# Altium PCB IR180-19_5GF.PcbDoc
Units mm, origin at the board's own origin, x right, y up, seen from the top; angles counter-clockwise.
Board outline 180 x 19.5 mm, 2 copper layers (Top Layer, Bottom Layer); 112 components, 106 nets, 224 pads, 49 vias.
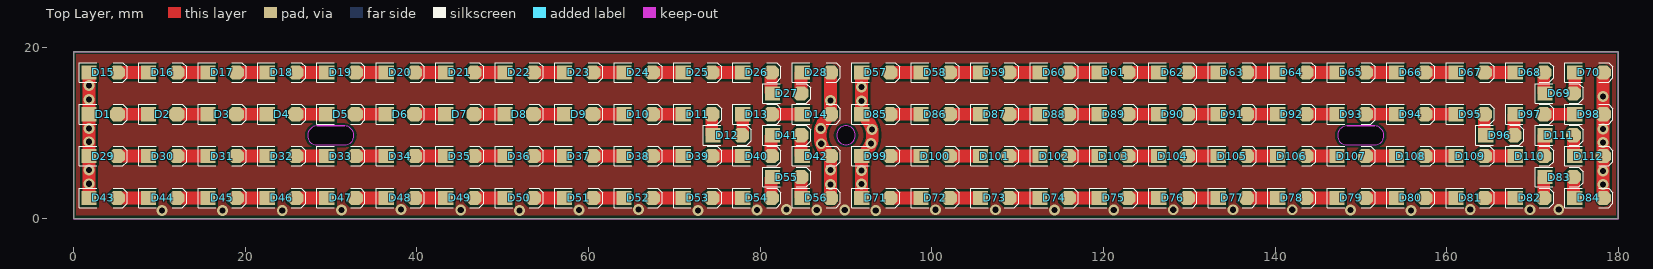
[diagram p0: Top Layer view]
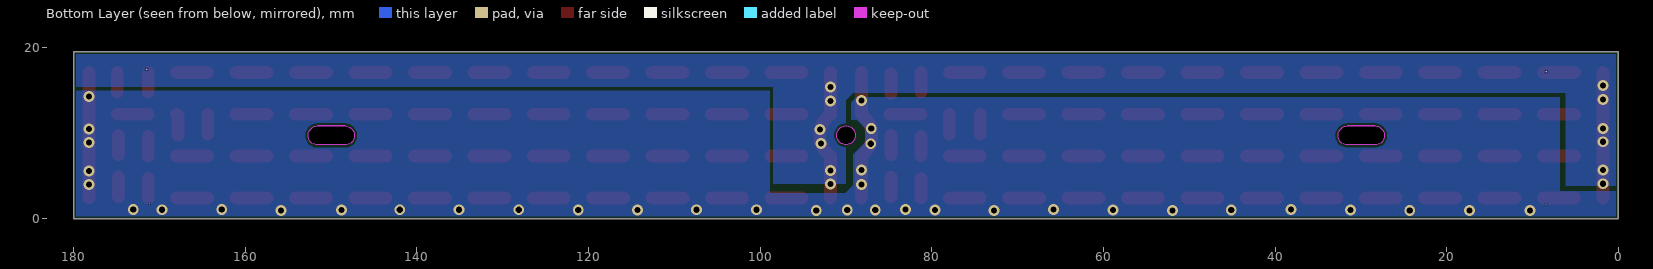
[diagram p1: Bottom Layer view, seen from below]
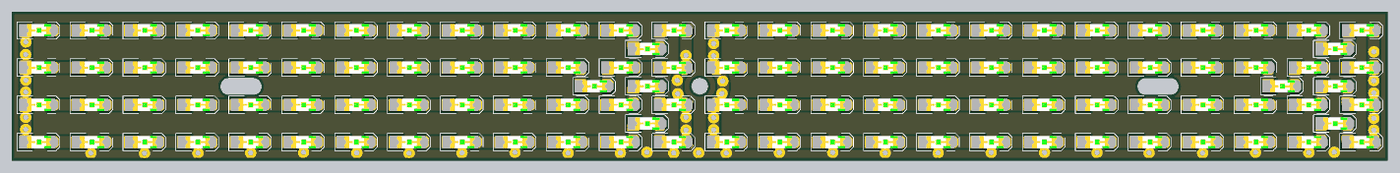
[diagram p2: 3D render of the assembled board from above, using the file's embedded part models]

## Layer stack, top to bottom
Top Solder: solder mask 0.0102, Solder Resist, Dk 3.5
Top Layer: signal copper 0.0356
Dielectric 1: dielectric 0.32, FR-4, Dk 4.8
Bottom Layer: signal copper 0.0356
Bottom Solder: solder mask 0.0102, Solder Resist, Dk 3.5

## Board outline
0,0 0,19.5 180,19.5 180,0
cut-out: 147.282,9.648 ccw(c148.311,9.661) 148.324,8.632 151.6,8.632 ccw(c151.626,9.674) 152.667,9.648 ccw(c151.543,9.718) 151.612,10.842 148.324,10.842 ccw(c148.4,9.725)
cut-out: 88.9,9.75 ccw(c90,9.75) 90,8.65 ccw(c90,9.75) 91.1,9.75 ccw(c90,9.75) 90,10.85 ccw(c90,9.75)
cut-out: 27.28,9.652 ccw(c28.308,9.665) 28.321,8.636 31.598,8.636 ccw(c31.623,9.677) 32.664,9.652 ccw(c31.54,9.721) 31.609,10.846 28.321,10.846 ccw(c28.397,9.728)

## Design rules (kind name [scope] priority, off if disabled: settings)
Clearance [All] p1: gap=0.254 ignorepadtopadclearanceinfootprint=FALSE except(0: Arc-Hole Track-Hole SMDPad-Hole THPad-Hole Via-Hole Fill-Hole Poly-Hole Region-Hole Text-Hole)
PolygonConnect [All] p1: connectstyle=Direct reliefconductorwidth=0.254 reliefentries=4 polygonreliefangle="90 Angle" airgapwidth=0.254
RoutingVias [All] p1: holewidth=0.711 width=1.27 viastyle="Through Hole" minholewidth=0.711 minwidth=1.27 maxholewidth=0.711 maxwidth=1.27
SolderMaskExpansion [All] p1: expansion=0.102
Width [All] p1: maxlimit=2 minlimit=0.254 preferedwidth=0.254 minimp=50.000000 maximp=50.000000 favimp=50.000000
30 further rules are at their usual default settings.

## Classes and differential pairs
component class IR180-19_5GF: D15 D16 D17 D18 D19 D20 D21 D22 D23 D24 D25 D26 D27 D28 D29 D30 D31 D32 D33 D34 D35 D36 D37 D38 D39 D40 D41 D42 D43 D44 D45 D46 D47 D48 D49 D50 D51 D52 D53 D54 D55 D56 D57 D58 D59 D60 D61 D62 D63 D64 D65 D66 D67 D68 D69 D70 D71 D72 D73 D74 D75 D76 D77 D78 D79 D80 D81 D82 D83 D84 D85 D86 D87 D88 D89 D90 D91 D92 D93 D94 D95 D96 D97 D98 D99 D100 D101 D102 D103 D104 D105 D106 D107 D108 D109 D110 D111 D112

## Components (designator, comment, footprint, x,y, rotation, side; value= is the part's Value field where it differs from the comment)
D1 "LED1206" IRLED2835M 3.462,12.19 r0 top
D2 "LED1206" IRLED2835M 10.386,12.19 r0 top
D3 "LED1206" IRLED2835M 17.31,12.19 r0 top
D4 "LED1206" IRLED2835M 24.234,12.19 r0 top
D5 "LED1206" IRLED2835M 31.158,12.19 r0 top
D6 "LED1206" IRLED2835M 38.082,12.19 r0 top
D7 "LED1206" IRLED2835M 45.006,12.19 r0 top
D8 "LED1206" IRLED2835M 51.93,12.19 r0 top
D9 "LED1206" IRLED2835M 58.854,12.19 r0 top
D10 "LED1206" IRLED2835M 65.778,12.19 r0 top
D11 "LED1206" IRLED2835M 72.702,12.19 r0 top
D12 "LED1206" IRLED2835M 76.164,9.752 r0 top
D13 "LED1206" IRLED2835M 79.626,12.19 r0 top
D14 "LED1206" IRLED2835M 86.55,12.19 r0 top
D15 "LED1206" IRLED2835M 3.462,17.066 r0 top
D16 "LED1206" IRLED2835M 10.386,17.066 r0 top
D17 "LED1206" IRLED2835M 17.31,17.066 r0 top
D18 "LED1206" IRLED2835M 24.234,17.066 r0 top
D19 "LED1206" IRLED2835M 31.158,17.066 r0 top
D20 "LED1206" IRLED2835M 38.082,17.066 r0 top
D21 "LED1206" IRLED2835M 45.006,17.066 r0 top
D22 "LED1206" IRLED2835M 51.93,17.066 r0 top
D23 "LED1206" IRLED2835M 58.854,17.066 r0 top
D24 "LED1206" IRLED2835M 65.778,17.066 r0 top
D25 "LED1206" IRLED2835M 72.702,17.066 r0 top
D26 "LED1206" IRLED2835M 79.626,17.066 r0 top
D27 "LED1206" IRLED2835M 83.088,14.628 r0 top
D28 "LED1206" IRLED2835M 86.55,17.066 r0 top
D29 "LED1206" IRLED2835M 3.462,7.314 r0 top
D30 "LED1206" IRLED2835M 10.386,7.314 r0 top
D31 "LED1206" IRLED2835M 17.31,7.314 r0 top
D32 "LED1206" IRLED2835M 24.234,7.314 r0 top
D33 "LED1206" IRLED2835M 31.158,7.314 r0 top
D34 "LED1206" IRLED2835M 38.082,7.314 r0 top
D35 "LED1206" IRLED2835M 45.006,7.314 r0 top
D36 "LED1206" IRLED2835M 51.93,7.314 r0 top
D37 "LED1206" IRLED2835M 58.854,7.314 r0 top
D38 "LED1206" IRLED2835M 65.778,7.314 r0 top
D39 "LED1206" IRLED2835M 72.702,7.314 r0 top
D40 "LED1206" IRLED2835M 79.626,7.314 r0 top
D41 "LED1206" IRLED2835M 83.088,9.752 r0 top
D42 "LED1206" IRLED2835M 86.55,7.314 r0 top
D43 "LED1206" IRLED2835M 3.462,2.438 r0 top
D44 "LED1206" IRLED2835M 10.386,2.438 r0 top
D45 "LED1206" IRLED2835M 17.31,2.438 r0 top
D46 "LED1206" IRLED2835M 24.234,2.438 r0 top
D47 "LED1206" IRLED2835M 31.158,2.438 r0 top
D48 "LED1206" IRLED2835M 38.082,2.438 r0 top
D49 "LED1206" IRLED2835M 45.006,2.438 r0 top
D50 "LED1206" IRLED2835M 51.93,2.438 r0 top
D51 "LED1206" IRLED2835M 58.854,2.438 r0 top
D52 "LED1206" IRLED2835M 65.778,2.438 r0 top
D53 "LED1206" IRLED2835M 72.702,2.438 r0 top
D54 "LED1206" IRLED2835M 79.626,2.438 r0 top
D55 "LED1206" IRLED2835M 83.088,4.876 r0 top
D56 "LED1206" IRLED2835M 86.55,2.438 r0 top
D57 "LED1206" IRLED2835M 93.474,17.066 r0 top
D58 "LED1206" IRLED2835M 100.398,17.066 r0 top
D59 "LED1206" IRLED2835M 107.322,17.066 r0 top
D60 "LED1206" IRLED2835M 114.246,17.066 r0 top
D61 "LED1206" IRLED2835M 121.17,17.066 r0 top
D62 "LED1206" IRLED2835M 128.094,17.066 r0 top
D63 "LED1206" IRLED2835M 135.018,17.066 r0 top
D64 "LED1206" IRLED2835M 141.942,17.066 r0 top
D65 "LED1206" IRLED2835M 148.866,17.066 r0 top
D66 "LED1206" IRLED2835M 155.79,17.066 r0 top
D67 "LED1206" IRLED2835M 162.714,17.066 r0 top
D68 "LED1206" IRLED2835M 169.638,17.066 r0 top
D69 "LED1206" IRLED2835M 173.1,14.628 r0 top
D70 "LED1206" IRLED2835M 176.562,17.066 r0 top
D71 "LED1206" IRLED2835M 93.474,2.438 r0 top
D72 "LED1206" IRLED2835M 100.398,2.438 r0 top
D73 "LED1206" IRLED2835M 107.322,2.438 r0 top
D74 "LED1206" IRLED2835M 114.246,2.438 r0 top
D75 "LED1206" IRLED2835M 121.17,2.438 r0 top
D76 "LED1206" IRLED2835M 128.094,2.438 r0 top
D77 "LED1206" IRLED2835M 135.018,2.438 r0 top
D78 "LED1206" IRLED2835M 141.942,2.438 r0 top
D79 "LED1206" IRLED2835M 148.866,2.438 r0 top
D80 "LED1206" IRLED2835M 155.79,2.438 r0 top
D81 "LED1206" IRLED2835M 162.714,2.438 r0 top
D82 "LED1206" IRLED2835M 169.638,2.438 r0 top
D83 "LED1206" IRLED2835M 173.1,4.876 r0 top
D84 "LED1206" IRLED2835M 176.562,2.438 r0 top
D85 "LED1206" IRLED2835M 93.474,12.19 r0 top
D86 "LED1206" IRLED2835M 100.398,12.19 r0 top
D87 "LED1206" IRLED2835M 107.322,12.19 r0 top
D88 "LED1206" IRLED2835M 114.246,12.19 r0 top
D89 "LED1206" IRLED2835M 121.17,12.19 r0 top
D90 "LED1206" IRLED2835M 128.094,12.19 r0 top
D91 "LED1206" IRLED2835M 135.018,12.19 r0 top
D92 "LED1206" IRLED2835M 141.942,12.19 r0 top
D93 "LED1206" IRLED2835M 148.866,12.19 r0 top
D94 "LED1206" IRLED2835M 155.79,12.19 r0 top
D95 "LED1206" IRLED2835M 162.714,12.19 r0 top
D96 "LED1206" IRLED2835M 166.176,9.752 r0 top
D97 "LED1206" IRLED2835M 169.638,12.19 r0 top
D98 "LED1206" IRLED2835M 176.562,12.19 r0 top
D99 "LED1206" IRLED2835M 93.474,7.314 r0 top
D100 "LED1206" IRLED2835M 100.398,7.314 r0 top
D101 "LED1206" IRLED2835M 107.322,7.314 r0 top
D102 "LED1206" IRLED2835M 114.246,7.314 r0 top
D103 "LED1206" IRLED2835M 121.17,7.314 r0 top
D104 "LED1206" IRLED2835M 128.094,7.314 r0 top
D105 "LED1206" IRLED2835M 135.018,7.314 r0 top
D106 "LED1206" IRLED2835M 141.942,7.314 r0 top
D107 "LED1206" IRLED2835M 148.866,7.314 r0 top
D108 "LED1206" IRLED2835M 155.79,7.314 r0 top
D109 "LED1206" IRLED2835M 162.714,7.314 r0 top
D110 "LED1206" IRLED2835M 169.638,7.314 r0 top
D111 "LED1206" IRLED2835M 173.1,9.752 r0 top
D112 "LED1206" IRLED2835M 176.562,7.314 r0 top

## Footprints (in the part's own frame and the unit in brackets; to place one, negate y for a bottom-side part, rotate by r counter-clockwise, add the part's x,y. Pads: shape width x height; smd on the part's side, far side on the other; paste and mask are expansions set on the pad)
IRLED2835M [mil]
  rect 70x65 smd: 1(-65,0)
  oct 70x65 smd: 2(65,0)
  silkscreen extent -110,-45 110,45, body extent -60,-32 66,32, height 36

## Via types
v1: diameter 1.27, hole 0.712, Top Layer to Bottom Layer, 49 vias

## Nets (pads, with @x,y where several pads share a name; then routed paths per layer and width w, separated by ;. In a path a pad name is that pad's centre, name@x,y a point inside that pad or via, vN(x,y) a via of type N, cw(c..) or ccw(c..) an arc to the next point about the centre after c; other vN are vias at no path point)
GND: D14.2 D28.2 D42.2 D56.2 D70.2 D84.2 D98.2 D112.2 | length 29.4
  Top Layer w1.5: D42.2@87.739,7.776 cw(c89.535,9.572) 86.995,9.572 86.995,9.932 cw(c89.535,9.932) 87.739,11.728 D14.2 D28.2 ; D56.2 D42.2 ; D84.2 D112.2 D98.2 D70.2
  other v1: 17.34,0.97 51.97,0.97 10.32,1 24.32,1 72.77,1 93.47,1 155.81,1 31.23,1.03 45.12,1.03 58.88,1.03 79.61,1.03 86.59,1.03 89.86,1.03 114.27,1.03 121.19,1.03 148.8,1.03 100.42,1.07 107.4,1.07 128.13,1.07 135.11,1.07 141.99,1.07 169.71,1.07 38.14,1.1 65.82,1.1 83.09,1.1 162.73,1.1 173.04,1.1 178.22,4 88.21,4.01 178.21,5.56 88.19,5.7 87.12,8.76 178.22,8.88 178.21,10.48 87.06,10.52 88.19,13.78 178.22,14.26
NetD1_2: D1.2 D2.1 | length 3.6
  Top Layer w1.5: D1.2 D2.1
NetD2_2: D2.2 D3.1 | length 3.6
  Top Layer w1.5: D2.2 D3.1
NetD3_2: D3.2 D4.1 | length 3.6
  Top Layer w1.5: D3.2 D4.1
NetD4_2: D4.2 D5.1 | length 3.6
  Top Layer w1.5: D4.2 D5.1
NetD5_2: D5.2 D6.1 | length 3.6
  Top Layer w1.5: D5.2 D6.1
NetD6_2: D6.2 D7.1 | length 3.6
  Top Layer w1.5: D6.2 D7.1
NetD7_2: D7.2 D8.1 | length 3.6
  Top Layer w1.5: D7.2 D8.1
NetD8_2: D8.2 D9.1 | length 3.6
  Top Layer w1.5: D8.2 D9.1
NetD9_2: D9.2 D10.1 | length 3.6
  Top Layer w1.5: D9.2 D10.1
NetD10_2: D10.2 D11.1 | length 3.6
  Top Layer w1.5: D10.2 D11.1
NetD11_2: D11.2 D12.1 | length 2.3
  Top Layer w1.5: D12.1@74.353,9.912 D11.2
NetD12_2: D12.2 D13.1 | length 2.3
  Top Layer w1.5: D12.2@77.975,9.912 D13.1
NetD13_2: D13.2 D14.1 | length 3.6
  Top Layer w1.5: D13.2 D14.1
NetD15_2: D15.2 D16.1 | length 3.6
  Top Layer w1.5: D15.2 D16.1
NetD16_2: D16.2 D17.1 | length 3.6
  Top Layer w1.5: D16.2 D17.1
NetD17_2: D17.2 D18.1 | length 3.6
  Top Layer w1.5: D17.2 D18.1
NetD18_2: D18.2 D19.1 | length 3.6
  Top Layer w1.5: D18.2 D19.1
NetD19_2: D19.2 D20.1 | length 3.6
  Top Layer w1.5: D19.2 D20.1
NetD20_2: D20.2 D21.1 | length 3.6
  Top Layer w1.5: D20.2 D21.1
NetD21_2: D21.2 D22.1 | length 3.6
  Top Layer w1.5: D21.2 D22.1
NetD22_2: D22.2 D23.1 | length 3.6
  Top Layer w1.5: D22.2 D23.1
NetD23_2: D23.2 D24.1 | length 3.6
  Top Layer w1.5: D23.2 D24.1
NetD24_2: D24.2 D25.1 | length 3.6
  Top Layer w1.5: D24.2 D25.1
NetD25_2: D25.2 D26.1 | length 3.6
  Top Layer w1.5: D25.2 D26.1
NetD26_2: D26.2 D27.1 | length 2.3
  Top Layer w1.5: D27.1@81.277,14.788 D26.2
NetD27_2: D27.2 D28.1 | length 2.3
  Top Layer w1.5: D27.2 D28.1@84.739,16.906
NetD29_2: D29.2 D30.1 | length 3.6
  Top Layer w1.5: D29.2 D30.1
NetD30_2: D30.2 D31.1 | length 3.6
  Top Layer w1.5: D30.2 D31.1
NetD31_2: D31.2 D32.1 | length 3.6
  Top Layer w1.5: D31.2 D32.1
NetD32_2: D32.2 D33.1 | length 3.6
  Top Layer w1.5: D32.2 D33.1
NetD33_2: D33.2 D34.1 | length 3.6
  Top Layer w1.5: D33.2 D34.1
NetD34_2: D34.2 D35.1 | length 3.6
  Top Layer w1.5: D34.2 D35.1
NetD35_2: D35.2 D36.1 | length 3.6
  Top Layer w1.5: D35.2 D36.1
NetD36_2: D36.2 D37.1 | length 3.6
  Top Layer w1.5: D36.2 D37.1
NetD37_2: D37.2 D38.1 | length 3.6
  Top Layer w1.5: D37.2 D38.1
NetD38_2: D38.2 D39.1 | length 3.6
  Top Layer w1.5: D38.2 D39.1
NetD39_2: D39.2 D40.1 | length 3.6
  Top Layer w1.5: D39.2 D40.1
NetD40_2: D40.2 D41.1 | length 2.3
  Top Layer w1.5: D40.2 D41.1@81.277,9.592
NetD41_2: D41.2 D42.1 | length 2.3
  Top Layer w1.5: D42.1@84.739,7.474 D41.2
NetD43_2: D43.2 D44.1 | length 3.6
  Top Layer w1.5: D43.2 D44.1
NetD44_2: D44.2 D45.1 | length 3.6
  Top Layer w1.5: D44.2 D45.1
NetD45_2: D45.2 D46.1 | length 3.6
  Top Layer w1.5: D45.2 D46.1
NetD46_2: D46.2 D47.1 | length 3.6
  Top Layer w1.5: D46.2 D47.1
NetD47_2: D47.2 D48.1 | length 3.6
  Top Layer w1.5: D47.2 D48.1
NetD48_2: D48.2 D49.1 | length 3.6
  Top Layer w1.5: D48.2 D49.1
NetD49_2: D49.2 D50.1 | length 3.6
  Top Layer w1.5: D49.2 D50.1
NetD50_2: D50.2 D51.1 | length 3.6
  Top Layer w1.5: D50.2 D51.1
NetD51_2: D51.2 D52.1 | length 3.6
  Top Layer w1.5: D51.2 D52.1
NetD52_2: D52.2 D53.1 | length 3.6
  Top Layer w1.5: D52.2 D53.1
NetD53_2: D53.2 D54.1 | length 3.6
  Top Layer w1.5: D53.2 D54.1
NetD54_2: D54.2 D55.1 | length 2.3
  Top Layer w1.5: D54.2 D55.1@81.277,4.716
NetD55_2: D55.2 D56.1 | length 2.3
  Top Layer w1.5: D56.1@84.739,2.598 D55.2
NetD57_2: D57.2 D58.1 | length 3.6
  Top Layer w1.5: D57.2 D58.1
NetD58_2: D58.2 D59.1 | length 3.6
  Top Layer w1.5: D58.2 D59.1
NetD59_2: D59.2 D60.1 | length 3.6
  Top Layer w1.5: D59.2 D60.1
NetD60_2: D60.2 D61.1 | length 3.6
  Top Layer w1.5: D60.2 D61.1
NetD61_2: D61.2 D62.1 | length 3.6
  Top Layer w1.5: D61.2 D62.1
NetD62_2: D62.2 D63.1 | length 3.6
  Top Layer w1.5: D62.2 D63.1
NetD63_2: D63.2 D64.1 | length 3.6
  Top Layer w1.5: D63.2 D64.1
NetD64_2: D64.2 D65.1 | length 3.6
  Top Layer w1.5: D64.2 D65.1
NetD65_2: D65.2 D66.1 | length 3.6
  Top Layer w1.5: D65.2 D66.1
NetD66_2: D66.2 D67.1 | length 3.6
  Top Layer w1.5: D66.2 D67.1
NetD67_2: D67.2 D68.1 | length 3.6
  Top Layer w1.5: D67.2 D68.1
NetD68_2: D68.2 D69.1 | length 2.3
  Top Layer w1.5: D69.1@171.289,14.788 D68.2
NetD69_2: D69.2 D70.1 | length 2.3
  Top Layer w1.5: D69.2@174.911,14.788 D70.1
NetD71_2: D71.2 D72.1 | length 3.6
  Top Layer w1.5: D71.2 D72.1
NetD72_2: D72.2 D73.1 | length 3.6
  Top Layer w1.5: D72.2 D73.1
NetD73_2: D73.2 D74.1 | length 3.6
  Top Layer w1.5: D73.2 D74.1
NetD74_2: D74.2 D75.1 | length 3.6
  Top Layer w1.5: D74.2 D75.1
NetD75_2: D75.2 D76.1 | length 3.6
  Top Layer w1.5: D75.2 D76.1
NetD76_2: D76.2 D77.1 | length 3.6
  Top Layer w1.5: D76.2 D77.1
NetD77_2: D77.2 D78.1 | length 3.6
  Top Layer w1.5: D77.2 D78.1
NetD78_2: D78.2 D79.1 | length 3.6
  Top Layer w1.5: D78.2 D79.1
NetD79_2: D79.2 D80.1 | length 3.6
  Top Layer w1.5: D79.2 D80.1
NetD80_2: D80.2 D81.1 | length 3.6
  Top Layer w1.5: D80.2 D81.1
NetD81_2: D81.2 D82.1 | length 3.6
  Top Layer w1.5: D81.2 D82.1
NetD82_2: D82.2 D83.1 | length 2.3
  Top Layer w1.5: D82.2 D83.1@171.289,4.716
NetD83_2: D83.2 D84.1 | length 2.3
  Top Layer w1.5: D84.1@174.751,2.598 D83.2
NetD85_2: D85.2 D86.1 | length 3.6
  Top Layer w1.5: D85.2 D86.1
NetD86_2: D86.2 D87.1 | length 3.6
  Top Layer w1.5: D86.2 D87.1
NetD87_2: D87.2 D88.1 | length 3.6
  Top Layer w1.5: D87.2 D88.1
NetD88_2: D88.2 D89.1 | length 3.6
  Top Layer w1.5: D88.2 D89.1
NetD89_2: D89.2 D90.1 | length 3.6
  Top Layer w1.5: D89.2 D90.1
NetD90_2: D90.2 D91.1 | length 3.6
  Top Layer w1.5: D90.2 D91.1
NetD91_2: D91.2 D92.1 | length 3.6
  Top Layer w1.5: D91.2 D92.1
NetD92_2: D92.2 D93.1 | length 3.6
  Top Layer w1.5: D92.2 D93.1
NetD93_2: D93.2 D94.1 | length 3.6
  Top Layer w1.5: D93.2 D94.1
NetD94_2: D94.2 D95.1 | length 3.6
  Top Layer w1.5: D94.2 D95.1
NetD95_2: D95.2 D96.1 | length 2.3
  Top Layer w1.5: D96.1@164.365,9.912 D95.2
NetD96_2: D96.2 D97.1 | length 2.5
  Top Layer w1.5: D96.2 167.827,12.03 D97.1
NetD97_2: D97.2 D98.1 | length 3.6
  Top Layer w1.5: D97.2 D98.1
NetD99_2: D99.2 D100.1 | length 3.6
  Top Layer w1.5: D99.2 D100.1
NetD100_2: D100.2 D101.1 | length 3.6
  Top Layer w1.5: D100.2 D101.1
NetD101_2: D101.2 D102.1 | length 3.6
  Top Layer w1.5: D101.2 D102.1
NetD102_2: D102.2 D103.1 | length 3.6
  Top Layer w1.5: D102.2 D103.1
NetD103_2: D103.2 D104.1 | length 3.6
  Top Layer w1.5: D103.2 D104.1
NetD104_2: D104.2 D105.1 | length 3.6
  Top Layer w1.5: D104.2 D105.1
NetD105_2: D105.2 D106.1 | length 3.6
  Top Layer w1.5: D105.2 D106.1
NetD106_2: D106.2 D107.1 | length 3.6
  Top Layer w1.5: D106.2 D107.1
NetD107_2: D107.2 D108.1 | length 3.6
  Top Layer w1.5: D107.2 D108.1
NetD108_2: D108.2 D109.1 | length 3.6
  Top Layer w1.5: D108.2 D109.1
NetD109_2: D109.2 D110.1 | length 3.6
  Top Layer w1.5: D109.2 D110.1
NetD110_2: D110.2 D111.1 | length 2.3
  Top Layer w1.5: D110.2 D111.1@171.289,9.592
NetD111_2: D111.2 D112.1 | length 2.3
  Top Layer w1.5: D112.1@174.751,7.474 D111.2
VCC: D1.1 D15.1 D29.1 D43.1 D57.1 D71.1 D85.1 D99.1 | length 29.4
  Top Layer w1.5: D43.1 D29.1 D1.1 D15.1 ; D71.1 D99.1 ; D57.1 D85.1 92.322,11.691 cw(c90.526,9.895) 93.066,9.895 93.066,9.609 cw(c90.526,9.609) D99.1@92.322,7.813
  other v1: 91.82,4.05 1.79,4.09 91.82,5.63 1.79,5.68 92.91,8.8 1.79,8.99 93.01,10.43 1.81,10.54 91.82,13.74 1.78,13.9 91.82,15.35 1.81,15.55

## Polygon pours and split planes (outlines as drawn)
GND on Bottom Layer "mos_gnd" (solid, remove dead copper, pour order 4): 0,0 -0.02,0.02 -0.02,3.25 6.83,3.25 6.83,14.18 88.8,14.18 89.41,13.57 89.41,11.55 88.74,11.55 87.78,10.59 87.78,8.95 89.18,7.55 89.18,3.92 90.11,2.99 98.89,2.99 98.89,14.95 179.6,14.95 179.99,14.56 179.99,0 0.07,0
VCC on Bottom Layer "mos_gnd" (solid, remove dead copper, pour order 2): 0.02,19.5 0,19.48 0,3.85 6.11,3.85 6.14,3.82 6.14,14.7 89.16,14.7 90.01,13.85 90.01,4.1 98.42,4.1 98.49,4.17 98.49,15.37 179.94,15.37 179.99,15.42 179.99,19.5
GND on Top Layer "mos_gnd" (solid, remove dead copper, pour order 12): 0.32,19.16 0.28,19.12 0.28,0.4 179.71,0.4 179.72,0.41 179.71,0.42 179.71,19.21 0.36,19.21 0.33,19.18

## Keep-outs
Keep-Out Layer:
  circle w0.076: c90,9.75 r1.1
  lines w0.076: 0,0 0,19.5 180,19.5 180,0 0,0 ; 27.28,9.652 ccw(c28.308,9.665) 28.321,8.636 29.972,8.636 31.598,8.636 ccw(c31.623,9.677) 32.664,9.652 ccw(c31.54,9.721) 31.609,10.846 30.023,10.846 28.321,10.846 ccw(c28.397,9.728) 27.28,9.652 ; 147.282,9.648 cw(c148.4,9.725) 148.324,10.842 150.025,10.842 151.612,10.842 cw(c151.543,9.718) 152.667,9.648 cw(c151.626,9.674) 151.6,8.632 149.975,8.632 148.324,8.632 cw(c148.311,9.661) 147.282,9.648

## Silkscreen, mask and mechanical layers (free items; w line width, h text height)
Bottom Overlay:
  text "+" at 171.31,17.26 h0.25
  text "+" at 8.23,16.99 h0.25
  text "-" at 171.08,1.63 h0.25
  text "-" at 8.38,1.59 h0.25
Bottom Solder:
  region: 175.23,18.84 175.24,18.83 179.46,18.83 179.46,16.74 179.45,16.75 175.23,16.75
  region: 175.16,2.845 175.17,2.835 179.39,2.835 179.39,0.745 179.38,0.755 175.16,0.755
  region: 0.61,2.825 0.62,2.815 4.84,2.815 4.84,0.725 4.83,0.735 0.61,0.735
  region: 0.68,18.82 0.69,18.81 4.91,18.81 4.91,16.72 4.9,16.73 0.68,16.73